# EAGLE board tube-connector (EAGLE 7.2.0)
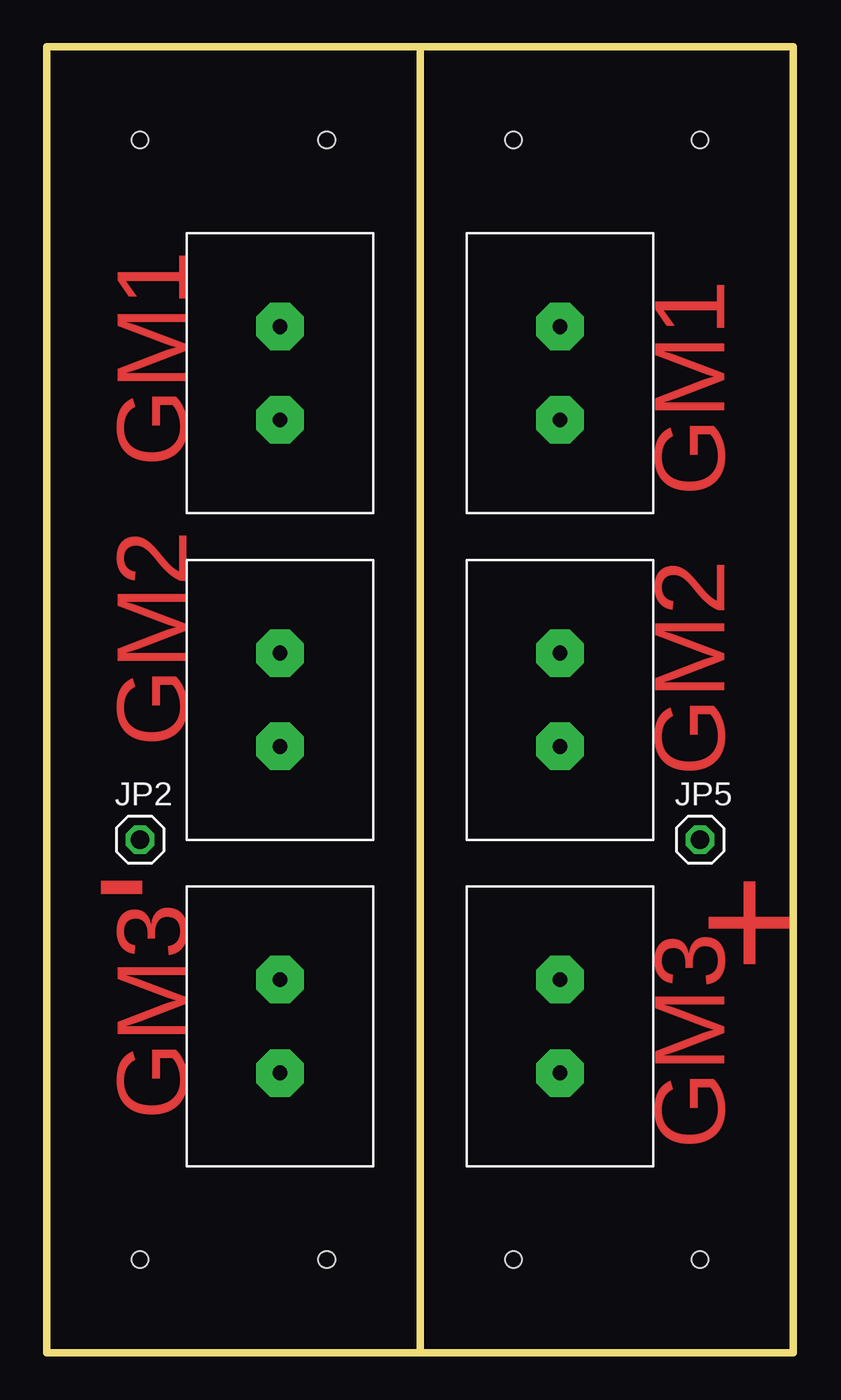
[diagram p0: board, top side]
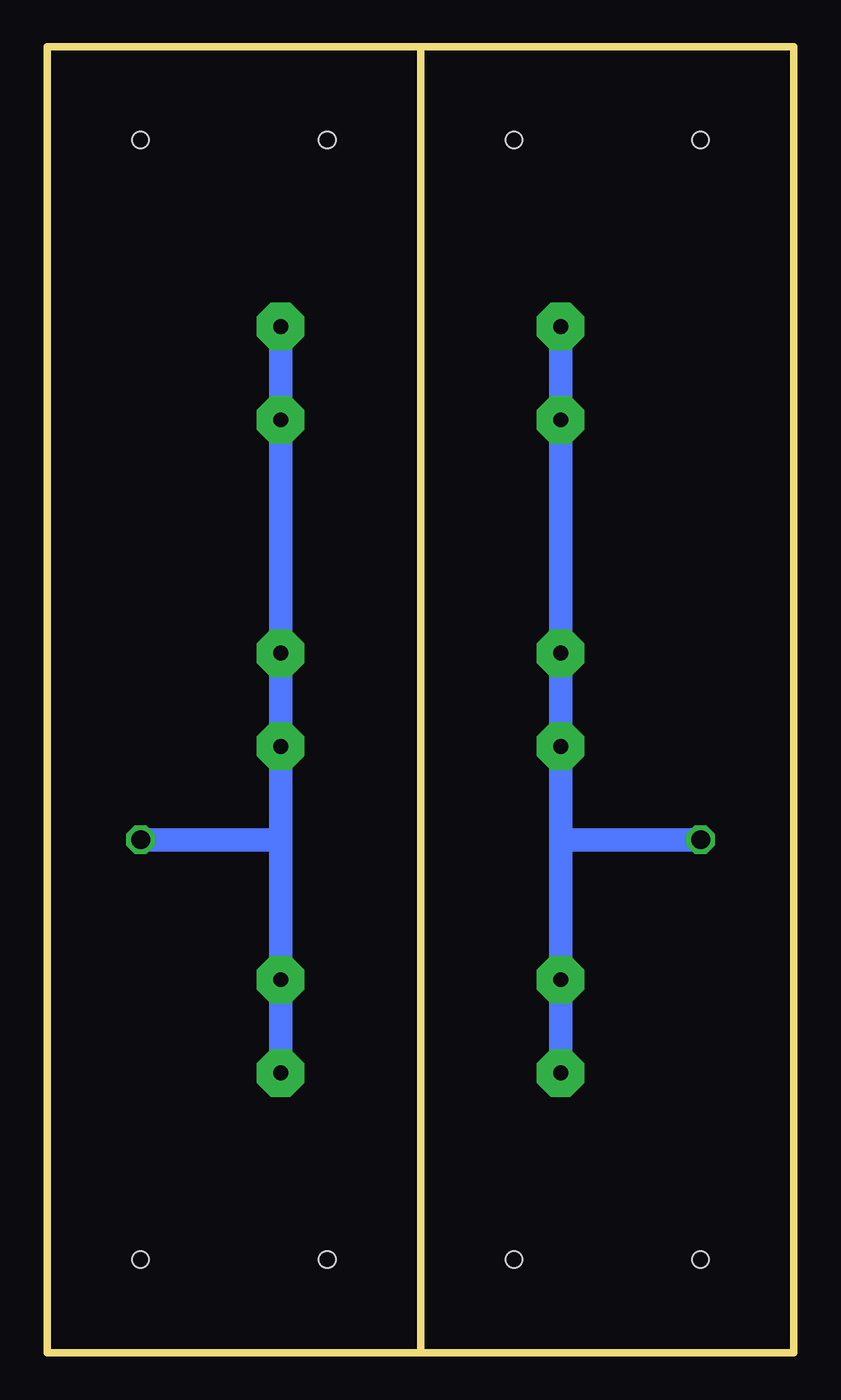
[diagram p1: board, bottom side, seen from below]

Size 40 x 70 mm. Coordinates in mm from the lower left corner, seen from the top.
Outline: 20,0 0,0 0,70 20,70
Outline: 20,0 40,0 40,70 20,70
Outline: 20,70 20,0
Copper layers (1*16): Top 0.035mm / dielectric 1.5mm / Bottom 0.035mm
Design rules "default *": minimum track width 10mil, minimum drill 24mil, track to track 8mil, track to pad 8mil, pad to pad 8mil, via to via 8mil, smd to smd 8mil, copper to edge 0mil, drill to drill 8mil, minimum pad ring 10mil, minimum via ring 8mil, stop-mask expansion 4mil, vias tented up to drill 0mil, thermal gap 10mil
Holes 0.9 mm at 5,65 15,65 5,5 15,5 25,5 35,5 35,65 25,65

## Footprints (pad centres in the part's own frame; a part is rotated, then mirrored left to right if it is on the bottom)
1X01 = drill 1.016 octagon: 1 0,0
GM-CONNECTOR = drill 0.8 pad 2.54 octagon: P$1 0,0; P$2 0,-5

## Placement (x,y rotation side)
JP2  [1X01]  5,27.5 0 top
JP5  [1X01]  35,27.5 0 top
U$1  GM-CONNECTOR  [GM-CONNECTOR]  12.5,37.5 0 top
U$2  GM-CONNECTOR  [GM-CONNECTOR]  12.5,55 0 top
U$3  GM-CONNECTOR  [GM-CONNECTOR]  12.5,20 0 top
U$4  GM-CONNECTOR  [GM-CONNECTOR]  27.5,37.5 0 top
U$5  GM-CONNECTOR  [GM-CONNECTOR]  27.5,55 0 top
U$6  GM-CONNECTOR  [GM-CONNECTOR]  27.5,20 0 top

## Library data of the parts
JP2 JP5 = pinhead
U$1-U$6 = gm-con

## Nets
N$3: JP2.1 U$1.P$1 U$1.P$2 U$2.P$1 U$2.P$2 U$3.P$1 U$3.P$2
N$4: JP5.1 U$4.P$1 U$4.P$2 U$5.P$1 U$5.P$2 U$6.P$1 U$6.P$2

## Tracks (layer width: path | path; a pad name or v marks a point on that pad's centre or on a via)
N$1
  cutout Bottom: 0,70 0,0 40,0 40,70
N$3
  Bottom 1.27: JP2.1 12.5,27.5 | 12.5,27.5 U$1.P$2 U$1.P$1 U$2.P$2 U$2.P$1 | 12.5,27.5 U$3.P$1 U$3.P$2
N$4
  Bottom 1.27: U$6.P$2 U$6.P$1 27.5,27.5 | 27.5,27.5 U$4.P$2 U$4.P$1 U$5.P$2 U$5.P$1 | JP5.1 27.5,27.5

## Text on the board
Top: GM1 | GM1 | GM2 | GM2 | - | GM3 | + | GM3